# Allegro board CY8CKIT-059_Layout.brd
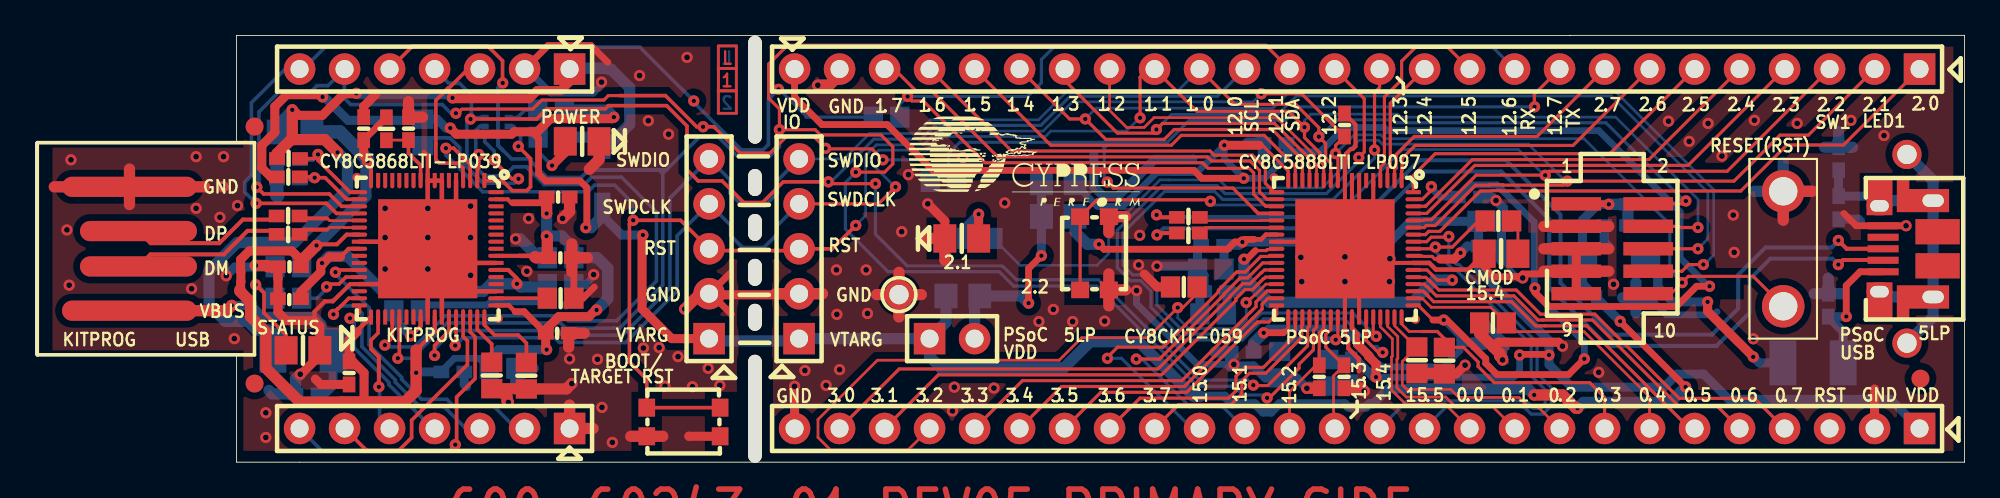
[diagram p0: board, top side]
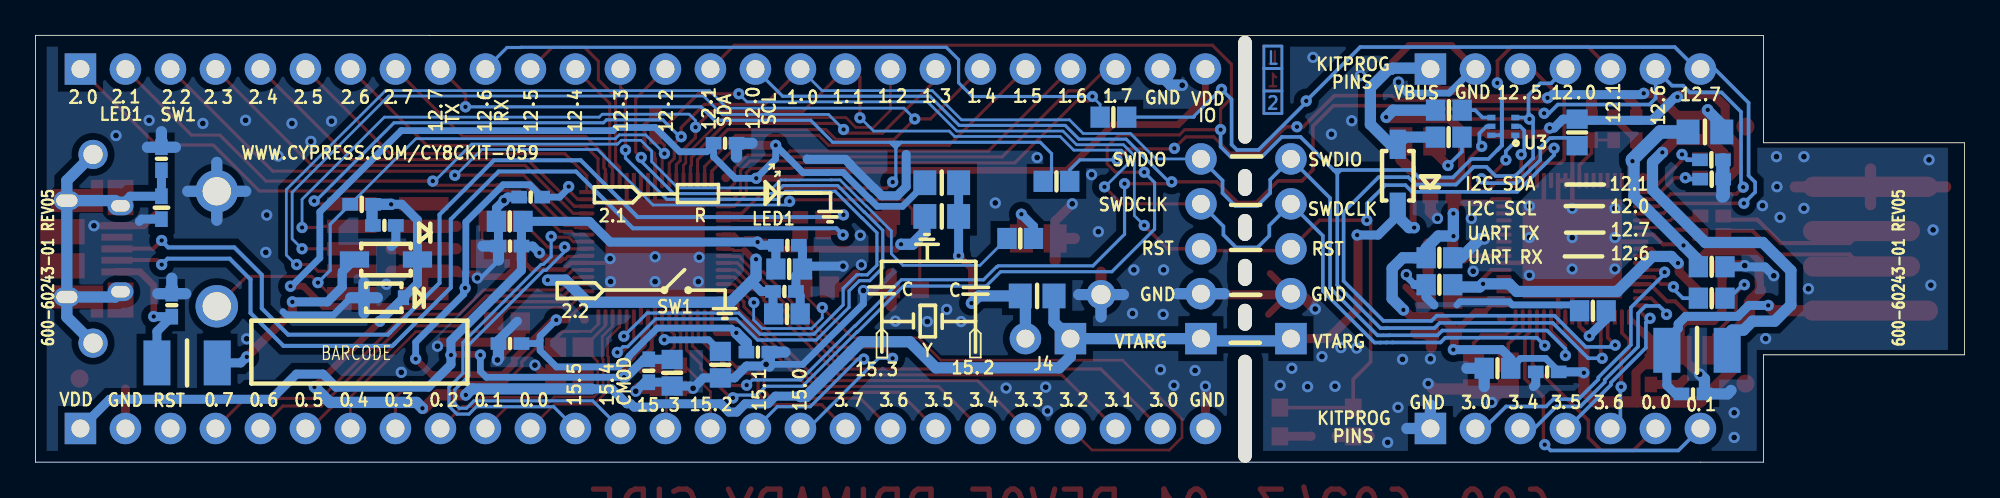
[diagram p1: board, bottom side, seen from below]

Outline 108.89 x 24.13 mm; copper layers: TOP, BOTTOM. Coordinates in mm from the lower left corner of the outline.
Outline path: 0,18.06 0,6.07 11.35,6.07 11.35,0 108.89,0 108.89,24.13 86.63,24.13 86.63,24.12 11.35,24.12 11.35,18.06 0,18.06

## Design rules (mm)
net group DP1: nets DM DP
net group DP2: nets KP_DM_P KP_DP_P
net group DP3: nets DM_P DP_P
nets with their own width: min track width 0.229; nets KP_DM KP_DP
nets with their own width: min track width 0.635; nets GND_EARTH1 GND_SIGNAL KP_VCCD KP_VDD P_VCCD VBUS VDD VTARG

## Placement (name value [footprint] x y rotation side)
C1  0.1 uF  [C-CC0402]  18.53 18.86 90 top
C2  0.1 uF  [C-CC0402]  21.06 18.86 90 top
C3  0.1 uF  [C-CC0402]  29.5 14.99 0 top
C4  2200 pF  [C-CC0805]  82.73 11.79 180 top
C5  0.1 uF  [C-CC0402]  29.63 11.56 0 top
C6  0.1 uF  [C-CC0402]  14.34 11.05 180 top
C7  1.0 uF  [C-CC0603]  64.82 9.91 180 top
C8  1.0 uF  [C-CC0603]  29.64 9.27 180 top
C9  1.0 uF  [C-CC0603]  82.27 7.87 180 top
C10  0.1 uF  [C-CC0402]  14.34 9.25 180 top
C11  0.1 uF  [C-CC0402]  29.45 7.29 0 top
C12  1.0 uF  [C-CC0603]  77.98 5.77 270 top
C13  1.0 uF  [C-CC0603]  79.53 5.74 270 top
C14  0.1 uF  [C-CC0402]  17.7 5.04 270 top
C15  1.0 uF  [C-CC0603]  25.76 4.9 270 top
C16  1.0 uF  [C-CC0603]  27.71 4.89 270 top
C17  0.1 uF  [C-CC0402]  73.89 19.06 90 top
C18  0.1 uF  [C-CC0402]  69.96 18.03 180 bottom
C19  0.01 uF  [C-CC0402]  101.78 17.16 90 bottom
C20  0.1 uF  [C-CC0402]  80.94 14.99 0 bottom
C21  1.0 uF  [C-CC0603]  82.12 13.61 0 bottom
C22  0.1 uF  [C-CC0402]  66.45 12.27 180 bottom
C23  0.1 uF  [C-CC0402]  82.11 12.22 0 bottom
C24  1.0 uF  [C-CC0603]  29.64 11.56 180 bottom
C25  1.0 uF  [C-CC0603]  14.27 11.05 180 bottom
C26  1.0 uF  [C-CC0603]  66.34 10.92 180 bottom
C27  0.1 uF  [C-CC0402]  101.19 8.88 90 bottom
C28  1.0 uF  [C-CC0603]  29.64 10.03 180 bottom
C29  0.1 uF  [C-CC0402]  66.61 9.65 180 bottom
C30  1.0 uF  [C-CC0603]  20.98 8.56 0 bottom
C31  1.0 uF  [C-CC0603]  66.47 8.38 180 bottom
C32  0.1 uF  [C-CC0402]  82.11 6.71 0 bottom
C33  0.1 uF  [C-CC0402]  89.19 13.39 180 bottom
C34  0.1 uF  [C-CC0402]  74.27 5.17 270 bottom
C35  0.1 uF  [C-CC0402]  68.11 6.22 180 bottom
C36  1.0 uF  [C-CC0603]  72.95 5.05 270 bottom
C37  1.0 uF  [C-CC0603]  70.23 5.51 270 bottom
C38  1.0 uF  [C-CC0603]  26.37 5.31 0 bottom
C39  0.1 uF  [C-CC0402]  23.56 5.11 0 bottom
C40  0.1 uF  [C-CC0402]  15.33 3.86 180 bottom
C41  0.1 uF  [C-CC0402]  73.86 4.83 270 top
C42  0.1 uF  [C-CC0402]  72.47 4.83 270 top
D1  MBR0520L  [SOD-123]  31.99 16.19 90 bottom
D2  MBR0520L  [SOD-123]  89.1 11.46 0 bottom
F1  PTC Resettable Fuse  [R-CR1210]  100.33 5.61 0 bottom
F2  PTC Resettable Fuse  [R-CR1210]  15.1 6.32 0 bottom
J1  HDR 1x26  [RECP26X1-VERT]  106.35 22.23 270 top
J2  HDR 1x26  [RECP26X1-VERT]  106.35 1.91 270 top
J3  HDR 1x5  [HDR5X1]  43.1 6.99 0 top
J4  HEADER 1X 2  [HDR2]  50.47 6.99 270 top
J5  50MIL KEYED SMD  [FCI-20021521]  89 12.06 270 top
J6  USB Micro-B  [USB-MICRO-B-SMT]  107.12 12.06 90 top
J7  HDR 1x5  [HDR5X1]  38.02 6.99 0 top
J8  HDR 1x7  [HDR7X1]  30.15 1.91 90 top
J9  HDR 1x7  [HDR7X1]  30.15 22.23 90 top
J10  USB FINGER  [USB-FINGER]  5.51 8.56 0 top
LED1  User LED BLUE  [CR-LED0805]  52.29 12.65 0 top
LED2  POWER LED Amber  [CR-LED0805_1]  30.86 18.14 180 top
LED3  Status LED Green  [CR-LED0805]  15.1 6.32 180 top
NOREF  -  [unnamed]  12.37 18.97 0 top
NOREF#2  -  [#2]  40.69 -8.76 0 top
NOREF#3  -  [#2]  216.88 -140.11 0 top
NOREF#4  -  [unnamed#2]  40.61 8.19 0 top
NOREF#5  -  [unnamed#3]  77.9 8.08 90 top
NOREF#6  -  [unnamed#4]  40.61 3.02 0 top
NOREF#7  -  [unnamed]  12.37 4.45 0 top
NOREF#8  -  [unnamed#2]  40.61 13.27 0 top
NOREF#9  -  [unnamed#3]  69.92 16.08 90 top
NOREF#10  -  [#2]  8.05 25.53 0 top
NOREF#11  -  [#2]  -1.63 6.07 90 top
NOREF#12  -  [#2]  113.93 -47.94 0 top
NOREF#13  -  [unnamed#3]  26.13 8.12 90 top
NOREF#14  -  [#2]  -214.2 -216.79 0 top
NOREF#15  -  [#2]  108.89 0 90 top
NOREF#16  -  [unnamed#4]  40.61 21.06 0 top
NOREF#17  -  [#2]  11.23 24.26 0 top
NOREF#18  -  [unnamed#2]  40.61 10.73 0 top
NOREF#19  -  [unnamed]  106.4 4.72 0 top
NOREF#20  -  [#2]  0 18.06 0 top
NOREF#21  -  [#2]  40.82 24.51 0 top
NOREF#22  -  [unnamed#2]  40.61 15.81 0 top
NOREF#23  -  [#2]  0 6.69 0 top
NOREF#24  -  [#2]  215.1 -114.71 0 top
NOREF#25  -  [unnamed#3]  18.14 16.1 90 top
NOREF#26  -  [#2]  38.6 12.06 180 bottom
NOREF#27  -  [#2]  -87.45 -141.35 180 bottom
NOREF#28  -  [#2]  58.66 12.06 180 bottom
R1  4.7K  [R-CR0402]  19.81 18.85 270 top
R2  15K  [R-CR0402]  14.29 17.17 0 top
R3  15K  [R-CR0402]  14.27 16.13 0 top
R4  22E  [R-CR0402]  14.26 13.92 0 top
R5  ZERO  [R-CR0603]  82.58 13.64 180 top
R6  22E  [R-CR0402]  14.26 12.88 0 top
R7  2.2K  [R-CR0603]  29.11 19.9 180 bottom
R8  ZERO  [R-CR0805]  14.66 18.67 180 bottom
R9  2.2K  [R-CR0603]  21.87 18.64 270 bottom
R10  560 ohm  [R-CR0603]  29.12 18.38 0 bottom
R11  ZERO  [R-CR0805]  57.73 13.89 0 bottom
R12  100K  [R-CR0402]  101.78 14.39 270 bottom
R13  30K  [R-CR0402]  14.29 17.09 180 bottom
R14  30K  [R-CR0402]  14.27 16 180 bottom
R15  ZERO  [R-CR0805]  57.73 15.8 0 bottom
R16  22E  [R-CR0402]  65.07 13.84 0 top
R17  22E  [R-CR0402]  65.07 12.95 0 top
R18  820 ohm  [R-CR0603]  53.3 12.65 180 bottom
R19  4.7K  [R-CR0402]  90.47 14.58 0 bottom
R20  ZERO  [R-CR0805]  52.35 9.4 0 bottom
R21  820 ohm  [R-CR0603]  14.27 9.27 180 bottom
R22  ZERO  [R-CR0603]  51.26 15.88 180 bottom
R23  ZERO  [R-CR0603]  48.04 19.51 180 bottom
SW1  Switch  [SWITCH-4PIN]  59.78 11.81 0 top
SW2  SW PUSHBUTTON  [THSWITCH]  98.65 12.06 90 top
SW3  Switch  [SWITCH-4PIN]  36.58 2.27 270 top
TP1  BLACK  [TP-43R_S]  48.74 9.47 0 top
TP2  BLACK  [TP-43R_S]  105.64 6.73 0 top
TP3  BLACK  [TP-43R_S]  105.64 17.4 0 top
TVS1  TVS DIODE  [SOD323]  89.23 9.3 0 bottom
U1  CY8C5868LTI-LP039 QFN68  [QFN68_8X8MM]  22.14 12.06 270 top
U2  CY8C5888LTI-LP097 QFN68  [QFN68_8X8MM]  73.91 12.06 270 top
U3  NTZD3152P  [SOT563]  26.04 18.99 0 bottom

## Library data of the parts
C1-C3 C5 C6 C10 C11 C14 C17 C18 C20 C22 C23 C27 C29 C32-C35 C39-C42 = 0.1 uFd 0402: alternate symbols: (C-CC0402_A)
C4 = CAP
C7-C9 C12 C13 C15 C16 C21 C24-C26 C28 C30 C31 C36-C38 = 1_0.0 uFd 0603 X5R 25V 10%: alternate symbols: (C-CC0603_A)
C19 = 0_0.01 uFd 0402 X7R
D1 D2 = TMP_134158
F1 F2 = FUSE_4
J1 J2 = CONN FLEX 27_0
J3 J7 = HDR 1x5 Keyed 0.1_M
J4 = CONN FLEX 2
J5 = 10 Pin Header 50mil Keyed SMD
J6 = USB Micro-B_2
J8 J9 = 8x1 RECPT VERT_0
J10 = USB MINI AB Right Angle_0
LED1-LED3 = LED Green 0805
R1 R19 = 4_0.7K ohm 5% 0603: alternate symbols: (R-CR0603_A)
R2 R3 R10 R13 R14 = RESISTOR
R4 R6 R16 R17 = 24 ohm 5% 0603 _0
R5 R22 R23 = Zero ohm 0603_2: alternate symbols: (R-CR0603_A)
R7 R9 = 2_0.2K ohm 5% 0603: alternate symbols: (R-CR0603_A)
R8 R11 R15 R20 = 330 ohm 5% 0805_1
R12 = 100K ohm 5% 0402: alternate symbols: (R-CR0402_A)
R18 R21 = 330 ohm 5% 0805_0
SW1 SW3 = Switch Pushbutton
SW2 = Push_Through_Hole
TP1-TP3 = TEST_POINT
TVS1 = TVS 5V SOD-323_0
U1 = CY8C5868LTI-LP039 QFN68
U2 = CY8C5888LTI-LP097 QFN68
U3 = FET DUAL P-CH 20V 430mA SOT-563

## Footprints (pads in the part's own frame, mm; a bottom-side part is the same pattern mirrored in y, then rotated)
C-CC0402
  rect 0.889x0.711 smd: 1(-0.648,0) 2(0.648,0)
C-CC0603
  rect 1.092x1.194 smd: 1(-0.749,0) 2(0.749,0)
C-CC0805
  rect 1.295x1.6 smd: 1(-0.953,0) 2(0.953,0)
CR-LED0805
  rect 1.295x1.6 smd: 1(-0.953,0) 2(0.953,0)
CR-LED0805_1
  rect 1.295x1.6 smd: 1(-0.953,0) 2(0.953,0)
FCI-20021521
  rect 0.759x2.799 smd: 1(-2.54,-2.029) 2(-2.54,2.029) 3(-1.27,-2.029) 4(-1.27,2.029) 5(0,-2.029) 6(0,2.029) 7(1.27,-2.029) 8(1.27,2.029) 9(2.54,-2.029) 10(2.54,2.029)
HDR2
  rect 1.778x1.778 hole 1.016: 1(0,0)
  round 1.778 hole 1.016: 2(0,2.54)
HDR5X1
  rect 1.778x1.778 hole 1.016: 1(0,0)
  round 1.778 hole 1.016: 2(0,2.54) 3(0,5.08) 4(0,7.62) 5(0,10.16)
HDR7X1
  rect 1.778x1.778 hole 1.016: 1(0,0)
  round 1.778 hole 1.016: 2(0,2.54) 3(0,5.08) 4(0,7.62) 5(0,10.16) 6(0,12.7) 7(0,15.24)
QFN68_8X8MM
  custom 0.864x0.23 smd: 1(-3.851,3.2) 2(-3.851,2.799) 3(-3.851,2.4) 4(-3.851,1.999) 5(-3.851,1.6) 6(-3.851,1.199) 7(-3.851,0.8) 8(-3.851,0.399) 9(-3.851,0) 10(-3.851,-0.399) 11(-3.851,-0.8) 12(-3.851,-1.199) 13(-3.851,-1.6) 14(-3.851,-1.999) 15(-3.851,-2.4) 16(-3.851,-2.799) 17(-3.851,-3.2) 35(3.851,-3.2) 36(3.851,-2.799) 37(3.851,-2.4) 38(3.851,-1.999) 39(3.851,-1.6) 40(3.851,-1.199) 41(3.851,-0.8) 42(3.851,-0.399) 43(3.851,0) 44(3.851,0.399) 45(3.851,0.8) 46(3.851,1.199) 47(3.851,1.6) 48(3.851,1.999) 49(3.851,2.4) 50(3.851,2.799) 51(3.851,3.2)
  custom 0.23x0.864 smd: 18(-3.2,-3.851) 19(-2.799,-3.851) 20(-2.4,-3.851) 21(-1.999,-3.851) 22(-1.6,-3.851) 23(-1.199,-3.851) 24(-0.8,-3.851) 25(-0.399,-3.851) 26(0,-3.851) 27(0.399,-3.851) 28(0.8,-3.851) 29(1.199,-3.851) 30(1.6,-3.851) 31(1.999,-3.851) 32(2.4,-3.851) 33(2.799,-3.851) 34(3.2,-3.851) 52(3.2,3.851) 53(2.799,3.851) 54(2.4,3.851) 55(1.999,3.851) 56(1.6,3.851) 57(1.199,3.851) 58(0.8,3.851) 59(0.399,3.851) 60(0,3.851) 61(-0.399,3.851) 62(-0.8,3.851) 63(-1.199,3.851) 64(-1.6,3.851) 65(-1.999,3.851) 66(-2.4,3.851) 67(-2.799,3.851) 68(-3.2,3.851)
  rect 5.601x5.601 smd: 69(0,0)
R-CR0402
  rect 0.889x0.711 smd: 1(-0.648,0) 2(0.648,0)
R-CR0603
  rect 1.092x1.194 smd: 1(-0.749,0) 2(0.749,0)
R-CR0805
  rect 1.295x1.397 smd: 1(-0.953,0) 2(0.953,0)
R-CR1210
  rect 1.524x2.54 smd: 1(-1.702,0) 2(1.702,0)
RECP26X1-VERT
  rect 1.778x1.778 hole 1.016: 1(0,0)
  round 1.778 hole 1.016: 2(0,-2.54) 3(0,-5.08) 4(0,-7.62) 5(0,-10.16) 6(0,-12.7) 7(0,-15.24) 8(0,-17.78) 9(0,-20.32) 10(0,-22.86) 11(0,-25.4) 12(0,-27.94) 13(0,-30.48) 14(0,-33.02) 15(0,-35.56) 16(0,-38.1) 17(0,-40.64) 18(0,-43.18) 19(0,-45.72) 20(0,-48.26) 21(0,-50.8) 22(0,-53.34) 23(0,-55.88) 24(0,-58.42) 25(0,-60.96) 26(0,-63.5)
SOD323
  rect 0.635x0.838 smd: 1(-1.113,0) 2(1.113,0)
SOD-123
  rect 1.651x0.914 smd: 1(-1.778,0) 2(1.778,0)
SOT563
  rect 0.457x0.305 smd: 1(-0.676,0.5) 2(-0.676,0) 3(-0.676,-0.5) 4(0.676,-0.5) 5(0.676,0) 6(0.676,0.5)
SWITCH-4PIN
  rect 1.016x0.94 smd: 1A(-0.81,2.07) 1B(-0.81,-2.07) 2A(0.81,2.07) 2B(0.81,-2.07)
THSWITCH
  round 2.4 hole 1.6: 1(-3.251,0) 2(3.251,0)
TP-43R_S
  round 1.651 hole 1.092: 1(0,0)
unnamed
  round 1.016 smd: (0,0)
unnamed#2
  oval 0.762x1.524 hole 0.762x1.524 unplated: (0,0)
unnamed#3
  round 0.508 smd: (0,0)
unnamed#4
  oval 0.762x6.096 hole 0.762x6.096 unplated: (0,0)
USB-FINGER
  oval 7.62x1.143 smd: 1(-0.203,0) 4(-0.203,7.003)
  oval 6.604x1.143 smd: 2(0.305,2.502) 3(0.305,4.501)
USB-MICRO-B-SMT
  rect 0.399x1.75 smd: 1(-1.3,2.824) 2(-0.65,2.824) 3(0,2.824) 4(0.65,2.824) 5(1.3,2.824)
  oval 1.059x1.46 hole 0.65x1.049: 6(-2.426,3.03) 7(2.426,3.03)
  oval 1.064x1.476 hole 0.701x1.199: 8(-2.725,0) 9(2.725,0)

## Nets
GND_EARTH1: C19.1 J6.6(S1) J6.7(S2) J6.8(S3) J6.9(S4) R12.1 TP2.1 TP3.1
GND_SIGNAL: C1.2 C2.2 C3.2 C4.2 C5.2 C6.2 C7.2 C8.1 C9.2 C10.2 C11.2 C12.2 C13.2 C14.2 C15.2 C16.2 C17.2 C18.2 C19.2 C20.2 C21.2 C22.2 C23.2 C24.2 C25.2 C26.2 C27.2 C28.1 C29.2 C30.2 C31.2 C32.2 C33.2 C34.2 C35.2 C36.2 C37.2 C38.2 C39.2 C40.2 C41.2 C42.2 J1.25 J2.2 J2.26 J3.2 J5.3 J5.5 J5.7 J5.9 J6.5(GND) J7.2 J8.1 J9.2 J10.4(GND) LED1.1(K) LED2.1(K) LED3.1(K) R12.2 R13.2 R14.2 SW1.2A SW1.2B SW2.2 SW3.2A SW3.2B TP1.1 TVS1.2(A) U1.5(VSSB) U1.7(VBOOST) U1.8(VBAT) U1.9(VSSD#9) U1.25(VSSD#25) U1.31(P3_2) U1.43(VSSA) U1.45(VSSD#45) U1.54(P0_5) U1.58(VSSD#58) U1.69(EPAD) U2.5(VSSB) U2.7(VBOOST) U2.8(VBAT) U2.9(VSSD#9) U2.25(VSSD#25) U2.43(VSSA) U2.45(VSSD#45) U2.58(VSSD#58) U2.69(EPAD)
VBUS: D1.2(ANODE) F2.1 J9.1 R2.1 R8.2 R10.2
VCCA: C30.1 U1.42(VCCA)
VCCA_12826895: C37.1 U2.42(VCCA)
VDD: C21.1 C22.1 C23.1 C26.1 C34.1 C36.1 J2.1 R11.2 U2.24(VDDD#24) U2.44(VDDA) U2.59(VDDD#59)
VDDIO: C18.1 C20.1 C32.1 C35.1 J1.26 R15.2 U2.17(VDDIO1) U2.35(VDDIO3) U2.52(VDDIO0) U2.67(VDDIO2)
DM: J6.2(DM) R17.1
DM_P: R17.2 U2.23(P15_7 DM)
DP: J6.3(DP) R16.1
DP_P: R16.2 U2.22(P15_6 DP)
I2C_SCL: J1.16 J9.4 U1.38(SIO, I2C1_SCL P12_0) U2.38(SIO, I2C1_SCL P12_0) U3.3(D2)
I2C_SDA: J1.15 J9.5 U1.39(SIO, I2C1_SDA P12_1) U2.39(SIO, I2C1_SDA P12_1) U3.6(D1)
KP_DM: J10.2(DM) R6.1
KP_DM_P: R6.2 U1.23(P15_7 DM)
KP_DP: J10.3(DP) R4.1
KP_DP_P: R4.2 U1.22(P15_6 DP)
KP_P0_0: J8.6 U1.48(P0_0)
KP_P0_1: J8.7 U1.49(P0_1)
KP_P0_2: C15.1 U1.50(P0_2)
KP_P0_3: C16.1 U1.51(P0_3)
KP_P0_4: C8.2 U1.53(P0_4)
KP_P0_6: U1.55(P0_6)
KP_P0_7: U1.56(P0_7)
KP_P1_6: R2.2 R13.1 U1.18(P1_6)
KP_P1_7: R3.2 R14.1 U1.19(P1_7)
KP_P2_6: U1.1(P2_6) U3.5(G2)
KP_P2_7: U1.2(P2_7) U3.2(G1)
KP_P3_0: J8.2 U1.29(P3_0)
KP_P3_1: R21.1 U1.30(P3_1)
KP_P3_4: J8.3 U1.33(P3_4)
KP_P3_5: J8.4 U1.34(P3_5)
KP_P3_6: J8.5 U1.36(P3_6)
KP_P12_5: J9.3 U1.4(P12_5 I2C0_SDA, SIO)
KP_VCCD: C10.1 C28.2 U1.26(VCCD#26) U1.57(VCCD#57)
KP_VDD: C1.1 C3.1 C5.1 C6.1 C11.1 C14.1 C24.1 C25.1 C38.1 C39.1 R1.1 R8.1 U1.17(VDDIO1) U1.24(VDDD#24) U1.35(VDDIO3) U1.44(VDDA) U1.52(VDDIO0) U1.59(VDDD#59) U1.67(VDDIO2)
KP_XRES: C2.1 R1.2 U1.10(XRES)
P0_0: J2.11 U2.48(P0_0)
P0_1: J2.10 U2.49(P0_1)
P0_2: C12.1 J2.9 U2.50(P0_2)
P0_3: C13.1 J2.8 U2.51(P0_3)
P0_4: C9.1 J2.7 U2.53(P0_4)
P0_5: J2.6 U2.54(P0_5)
P0_6: J2.5 U2.55(P0_6)
P0_7: J2.4 U2.56(P0_7)
P1_2: J1.19 U2.13(P1_2)
P1_3: J1.20 J5.6 U2.14(P1_3)
P1_4: J1.21 J5.8 U2.15(P1_4)
P1_5: J1.22 U2.16(P1_5)
P1_6: J1.23 U2.18(P1_6)
P1_7: J1.24 U2.19(P1_7)
P2_0: J1.1 U2.62(P2_0)
P2_1: J1.2 R18.1 U2.63(P2_1)
P2_2: J1.3 SW1.1A SW1.1B U2.64(P2_2)
P2_3: J1.4 U2.65(P2_3)
P2_4: J1.5 U2.66(P2_4)
P2_5: J1.6 U2.68(P2_5)
P2_6: J1.7 U2.1(P2_6)
P2_7: J1.8 U2.2(P2_7)
P3_0: J2.25 U2.29(P3_0)
P3_1: J2.24 U2.30(P3_1)
P3_2: C7.1 J2.23 U2.31(P3_2)
P3_3: J2.22 U2.32(P3_3)
P3_4: J2.21 U2.33(P3_4)
P3_5: J2.20 U2.34(P3_5)
P3_6: J2.19 U2.36(P3_6)
P3_7: J2.18 U2.37(P3_7)
P5LP_VDD: J4.2 R11.1 R15.1 R20.2
P12_2: J1.14 U2.46(SIO_P12_2)
P12_3: J1.13 U2.47(SIO_P12_3)
P12_4: J1.12 U2.3(P12_4 I2C0_SCL, SIO)
P12_5: J1.11 U2.4(P12_5 I2C0_SDA, SIO)
P12_6: J1.10 R23.1 U2.20(P12_6_SIO)
P12_7: J1.9 R22.1 U2.21(P12_7_SIO)
P15_0: J2.17 U2.27(P15_0)
P15_1: J2.16 U2.28(P15_1)
P15_2: C42.1 J2.15 U2.40(P15_2)
P15_3: C41.1 J2.14 U2.41(P15_3)
P15_4: J2.13 R5.2 U2.60(P15_4)
P15_5: J2.12 U2.61(P15_5)
P_VCCD: C29.1 C31.1 U2.26(VCCD#26) U2.57(VCCD#57)
P_XRES: J2.3
PROG_RESET: C17.1 J3.3 J5.10 J7.3 R19.2 SW2.1 SW3.1A SW3.1B U1.3(P12_4 I2C0_SCL, SIO) U2.10(XRES)
PROG_SWDCLK: J1.18 J3.4 J5.4 J7.4 U1.47(SIO_P12_3) U2.12(P1_1)
PROG_SWDIO: J1.17 J3.5 J5.2 J7.5 U1.46(SIO_P12_2) U2.11(P1_0)
UART RX: J9.6 R22.2 U1.20(P12_6_SIO)
UART TX: J9.7 R23.2 U1.21(P12_7_SIO)
VTARG: C33.1 D1.1(CATHODE) D2.1(CATHODE) J3.1 J4.1 J5.1 J7.1 R3.1 R7.1 R9.1 R19.1 R20.1 TVS1.1(K)
N11032: C40.1 F2.2 J10.1(VBUS)
N11130: LED2.2(A) R10.1
N039981: R9.2 U3.1(S1)
N046484: R7.2 U3.4(S2)
N5090994: LED1.2(A) R18.2
N5091026: C27.1 F1.2 J6.1(VBUS)
N12931548: D2.2(ANODE) F1.1
N12939185: C4.1 R5.1
N16779589: LED3.2(A) R21.2

Pads without a net: J6 4; U1 6 11 12 13 14 15 16 27 28 32 37 40 41 60 61 62 63 64 65 66 68; U2 6

## Via types
v1: diameter 0.635, hole 0.254, TOP to BOTTOM, 118 vias
v2: diameter 0.635, hole 0.33, TOP to BOTTOM, 102 vias

## Routing (per net, layer and track width the routed paths; a pad name or vN(x,y) marks a point on that pad's centre or on a via; arc(x,y) is an arc through that point)
GND_EARTH1: length 22.2
  BOTTOM w0.508: C19.1 R12.1 103.54,15.04 J6.7
  BOTTOM w0.635: J6.8 107.12,8.21 TP2.1 ; J6.8 104.39,9.34 J6.6 ; J6.8 J6.9 ; TP3.1 107.12,15.92 J6.9 ; J6.9 104.39,14.79 J6.7
GND_SIGNAL: length 314.8
  TOP w0.229: U2.45 74.71,11.26 ; 74.71,11.26 U2.69 ; 74.71,11.26 U2.58 ; 74.31,12.46 U2.8 ; 74.31,12.46 74.71,12.87 ; 74.31,12.46 U2.69 ; 74.1,6.44 74.1,7.04 73.91,7.23 U2.43 v2(73.91,10.21) ; 21.92,17.55 22.07,17.4 22.07,17.37 22.14,17.3 U1.9 ; U2.69 73.52,12.46 U2.25 ; U2.69 U2.9 73.91,17.15 73.97,17.2 73.97,17.43 74.24,17.7 74.36,17.7 74.51,17.86 74.51,19.09 C17.2 ; 15.75,8 15.75,8.51 16.33,9.09 16.79,9.09 17.76,10.07 U1.31 ; 74.71,12.87 U2.7 ; 74.71,12.87 75.51,13.67 U2.5
  TOP w0.254: U2.58 78.68,11.26 79.05,10.89 80.88,10.89 C4.2 ; U1.31 20.14,10.07 U1.69 ; U1.58 22.94,11.26 ; 22.94,11.26 24.54,9.66 U1.54 ; 22.94,11.26 U1.69 ; 22.94,11.26 U1.45 ; 22.94,12.87 23.74,13.67 U1.5 ; 22.94,12.87 U1.7 U1.8 U1.9 U1.69 ; 22.94,12.87 U1.69 ; U1.69 U1.43 ; U1.69 21.74,12.46 U1.25 ; 74.1,6.44 74.1,6.43 74.7,5.83 74.7,5.14
  TOP w0.381: 85.13,10.79 84.98,10.64 83.95,10.64 83.72,10.41 83.64,10.49 82.31,10.49 81.78,11.03 C4.2 ; 39.19,10.67 38.05,9.53 ; 102.07,14.06 102.77,13.37 J6.5 v2(105.59,13.37) 105.59,13.37 ; 32.31,22.61 31.36,23.56 28.94,23.56 J9.2 ; 30.28,10.77 30.39,10.65 C8.1 30.91,9.27 31.55,9.91 ; 38.19,9.46 39.29,8.36
  TOP w0.508: v2(42.85,4.29) J2.26 ; C14.2 16.1,4.39 15.8,4.7 ; J5.9 J5.7 J5.5 ; v2(80.7,5.49) 80.2,4.99 C13.2 ; C6.2 13.69,11.05 13.69,10.39 13.69,10.39 C10.2 13.69,8.48 14.17,8 15.75,8 16.05,7.7 LED3.1 16.05,6.03 14.99,4.97 v2(14.95,4.97) ; 19.21,20.79 18.53,20.12 C1.2 ; J7.2 38.13,9.53 38.19,9.46 43.04,9.46 J3.2 ; SW3.2A 36.89,1.46 36.88,1.47 ; J2.2 103.81,4.14 ; v2(71.42,11.58) 72.72,11.58 73.57,12.43 73.91,12.43 ; 82.29,6.5 82.57,6.78 85.97,6.78 v2(86.2,6.56) ; v2(50.37,14.61) 51.33,13.64 LED1.1 ; C7.2 63.32,9.91 62.59,10.64 ; v2(73.91,11.61) U2.69
  TOP w0.635: 21.85,19.51 C2.2 21.06,20.39 ; C5.2 31.16,11.56 ; C5.2 30.28,10.77 ; C5.2 30.28,12.35 ; SW1.2B 60.59,10.65 ; SW1.2B 61.53,9.74 ; SW1.2B 60.59,8.84 ; 60.59,12.98 SW1.2A 61.53,13.88 ; J7.2 37.52,9.53 v2(36.65,8.66) ; C41.2 74.84,4.18 v2(75.01,4.01) ; v2(12.41,11.12) 13.07,11.12 13.13,11.05 C6.2 ; J10.4 5.31,16.57 ; J10.4 1.06,15.57 ; J10.4 9.55,15.57 ; J10.4 5.31,14.56 ; 88.81,13.34 85.14,13.34 ; J1.25 45.39,21.9 44.8,21.31 v2(44.16,21.31) ; 100.29,15.32 SW2.2 98.65,13.68 ; 31.47,1.91 J8.1 30.15,3.23 ; 51.33,11.41 LED1.1 50.25,12.65 ; 85.14,10.79 J5.7 88.81,10.79 ; C15.2 26.15,4.15 ; 26.15,4.15 27.7,4.15 C16.2 29.97,4.14 v2(30.28,4.45) ; 26.15,4.15 26.62,3.68 26.62,3.45 v2(26.7,3.38) ; C42.2 v2(71.77,4.18) ; 88.81,12.06 J5.5 85.14,12.06 ; 48.74,8.21 TP1.1 ; TP1.1 50,9.47 ; TP1.1 48.74,10.73 ; TP1.1 47.48,9.47 ; 33.6,1.46 SW3.2B 35.41,1.46 ; C3.2 30.15,14.18 v2(29.75,13.78) ; LED2.1 31.81,17.11 31.27,16.56 ; 30.1,6.5 C11.2 30.98,7.29 ; C12.2 79.5,5.02 C13.2 ; v2(82.81,5.78) 82.81,5.83 82.65,5.99 82.65,6.14 81.52,7.27 C9.2 ; 41.78,9.53 J3.2 44.43,9.53
  BOTTOM w0.254: 82.75,11.43 82.75,11.4 83.74,10.42 83.94,10.42 v2(83.95,10.41)
  BOTTOM w0.381: J9.2 27.74,22.23 29.1,20.87 31.48,20.87 31.95,21.34 v2(31.95,21.49) ; 31.04,10.03 31.51,10.5 v2(31.51,10.6) ; v2(62.15,9.7) 62.15,8.95 65.58,5.53 v2(67.65,5.53) ; 28.66,8.89 28.48,9.07 25.7,9.07 25.52,8.89 22.1,8.89 21.75,8.54 C30.2 ; 91.1,9.3 91.1,9.29 92.06,8.33 94.74,8.33 94.92,8.51
  BOTTOM w0.508: v2(10.77,10.54) 11.26,11.04 12.33,11.04 v2(12.41,11.12) 12.47,11.05 C25.2 ; R12.2 102.9,13.74 103.02,13.61 ; C32.2 82.75,6.91 81.69,7.98 ; v2(67.65,5.53) 67.74,5.44 68.76,5.44 69.43,4.76 C37.2 71.18,4.76 v2(71.77,4.18) 71.89,4.31 C36.2 73.16,4.52 C34.2 74.5,4.52 v2(75.01,4.01) ; C33.2 88.54,12.45 88.8,12.19 ; 31.04,10.03 C28.1 30.39,9.33 29.95,8.89 ; C26.2 65.96,10.55 C29.2 65.72,9.41 C31.2 ; C26.2 65.44,11.08 v2(63.3,11.08) ; C26.2 65.6,12.06 C22.2 ; 24.33,4.27 24.21,4.39 C39.2 ; 59.74,17.4 59.74,15.57 60.25,15.06 61.13,15.06 61.55,15.49 61.56,15.49 62.92,16.84 62.92,16.87 63.17,17.12 65.3,17.12 65.33,17.14 ; C23.2 82.75,13.5 C21.2 82.87,14.37 v2(82.44,14.79) 82.25,14.99 C20.2
  BOTTOM w0.635: 44.43,9.53 J3.2 41.78,9.53 ; C24.2 28.42,11.56 27.35,12.62 v2(27.1,12.62) ; C27.2 101.98,9.53 ; C27.2 101.19,10.4 ; C27.2 100.4,9.53 ; v2(44.16,21.31) 44.8,21.31 45.39,21.9 J1.25 ; 27.11,4.28 C38.2 28.09,5.31 ; 69.32,17.24 C18.2 68.44,18.03 ; 47.48,9.47 TP1.1 ; TP1.1 50,9.47 ; TP1.1 48.74,8.21 ; C19.2 101.78,18.68 ; C19.2 100.99,17.81 ; C19.2 102.57,17.81 ; v2(14.95,4.97) 14.68,4.71 C40.2 13.38,3.86 13.18,4.06 ; SW2.2 100.29,15.32 ; SW2.2 98.65,16.95 ; SW2.2 98.65,13.68 ; SW2.2 97.02,15.32 ; 90.34,8.44 TVS1.2 ; TVS1.2 90.34,10.15 ; TVS1.2 89.59,9.3 ; TVS1.2 91.09,9.3 ; 82.75,11.43 C23.2 83.63,12.22 ; 67.46,5.43 C35.2 66.58,6.22 ; v2(82.81,5.78) 82.81,5.83 82.75,5.89 C32.2 ; 30.15,3.23 J8.1 31.47,1.91
  BOTTOM w0.762: 13.66,15.05 13.63,15.09 R14.2 13.64,16.01 R13.2
  vias: v2(1.78,13.13) v2(1.91,10.01) v2(2.01,17.09) v2(8.81,9.8) v2(9.07,17.27) v2(9.07,14.35) v2(10.41,13.84) v2(10.62,17.27) v2(10.59,15.57) v2(11.23,6.99) v2(11.4,14.5) v2(13,2.79) v2(13,1.4) v2(19.74,14.35) v2(19.74,12.7) v2(19.74,10.92) v2(22.15,14.35) v2(22.15,12.7) v2(22.15,10.92) v2(24.56,14.48) v2(24.56,12.7) v2(24.56,10.57) v2(27.74,10.79) v2(27.84,13.78) v2(30.15,5.84) v2(31.72,5.82) v2(31.98,3.1) v2(32.56,1.12) v2(34.1,21.86) v2(34.32,6.45) v2(34.59,19.3) v2(35.2,6.48) v2(35.53,4.29) v2(35.74,18.54) v2(36.27,5.97) v2(36.78,22.89) v2(37.08,4.27) v2(37.97,5.31) v2(38.63,4.34) v2(43.43,5.18) v2(44.63,4.34) v2(45.21,10.87) v2(45.24,8.36) v2(45.39,5.23) v2(46.89,10.87) v2(46.96,8.41) v2(48.89,13.03) v2(49.28,16.26) v2(51.77,2.9) v2(51.87,4.24) v2(52.35,17.22) v2(54.1,4.19) v2(54.71,14.66) v2(56.64,7.95) v2(57.45,8.64) v2(58.55,7.95) v2(60.35,7.98) v2(62.33,12.83) v2(62.27,11.15) v2(71.48,10.21) v2(76.45,11.51) v2(76.43,10.21) v2(88.24,5.08) v2(89.08,10.06) v2(92.18,19.28) v2(93.34,18.14) v2(94.41,19.15) v2(95.19,17.31) v2(95.83,13.97) v2(95.89,11.86) v2(97.03,19.33) v2(96.97,6.97) v2(99.44,19.15) v2(102.47,19.32) v2(104.34,18.47)
VBUS: length 55
  TOP w0.508: v1(23.54,20.6) 23.59,20.55 27.86,20.55 28.32,21.01 29.64,21.01 30.15,21.51 J9.1 ; v1(14.5,19.92) 14.55,19.92 14.86,19.61 16.2,19.61 17.41,20.83 18.03,20.83 18.05,20.85 v1(18.11,20.85)
  TOP w0.635: 14.5,18.31 14.57,18.24 16.33,18.24 v1(17.06,17.51) ; 14.5,18.31 13.64,17.45 R2.1 ; 14.5,18.31 v1(14.5,19.92)
  BOTTOM w0.381: 31.64,18.33 D1.2
  BOTTOM w0.508: v1(23.54,20.6) 23.45,20.6 23.26,20.78 18.18,20.78 v1(18.11,20.85)
  BOTTOM w0.635: v1(14.5,19.92) 14.5,19.88 13.7,19.09 R8.2 ; v1(17.06,17.51) 17.61,16.95 17.61,15.41 14.63,12.42 11.39,12.42 9.8,10.83 9.8,8.88 10.71,7.97 11.97,7.97 12.48,7.47 13.13,7.47 13.4,7.2 F2.1 ; R10.2 31.58,18.38 31.64,18.33 31.97,17.97 D1.2 32.41,17.97 33.54,19.1 33.54,21.18 32.49,22.23 32.33,22.23 32.28,22.28 30.2,22.28 J9.1
VCCA: length 3.1
  TOP w0.229: U1.42 21.74,7.69 21.57,7.52 21.56,7.52 v1(21.18,7.14)
  BOTTOM w0.508: v1(21.18,7.14) 20.23,8.09 C30.1
VCCA_12826895: length 4.8
  TOP w0.178: U2.42 73.52,7.11 73.39,6.99 v1(73.39,6.92)
  BOTTOM w0.381: C37.1 70.89,6.92 73.32,6.92 73.33,6.92 v1(73.39,6.92)
VDD: length 84
  TOP w0.178: U2.59 78.24,11.67 78.27,11.63 78.83,11.63 78.98,11.48 79.3,11.48
  TOP w0.254: 68.78,12.6 69.19,12.6 69.45,12.87 U2.24 ; 74.63,6.68 74.63,7.24 74.31,7.55 U2.44
  TOP w0.381: v1(83.78,6.06) 83.81,6.1 85.42,6.1 85.44,6.08 v1(85.44,6.06) ; v1(60.03,12.32) 60.31,12.04 67.28,12.04 67.69,12.45 v1(68.13,12.45) 68.28,12.6 68.78,12.6
  TOP w0.508: 79.3,11.48 80.09,11.48 v1(80.44,11.84) ; 74.63,6.68 74.63,6.66 75.24,6.05 75.24,5.99 75.67,5.56 v1(75.67,4.81)
  BOTTOM w0.381: v1(83.78,6.06) 83.78,5.14 83.44,4.8 75.67,4.8 v1(75.67,4.81)
  BOTTOM w0.508: v1(75.67,4.81) 75.54,4.81 74.53,5.82 C34.1 72.96,5.82 C36.1 ; C23.1 80.82,12.22 v1(80.44,11.84) ; C23.1 81.46,13.53 C21.1 77.62,13.61 76.45,12.45 v1(68.13,12.45) 67.95,12.27 C22.1 C26.1 ; C23.1 81.47,12.21 81.47,11.47 81.46,11.44 81.46,10.91 81.47,10.84 85.44,6.87 v1(85.44,6.06) 85.44,5.52 86.71,4.24 91.92,4.24 92.66,4.98 94.16,4.98 95.58,3.56 104.7,3.56 J2.1
  BOTTOM w0.635: R11.2 58.69,13.01 59.38,12.32 v1(60.03,12.32)
VDDIO: length 139.4
  TOP w0.178: 69.08,17.92 69.26,17.92 70.71,16.46 U2.17 ; U2.67 78.29,14.86 78.79,15.37 v1(78.79,15.58) ; 70.47,7.35 70.71,7.59 U2.35 ; 78.88,8.04 78.05,8.86 U2.52
  TOP w0.381: v1(87.43,5.84) 86.54,4.95 82.5,4.95 81.86,5.59 81.86,5.85 79.67,8.04 v1(79.49,8.04) 79.49,8.04 78.88,8.04 ; v1(84.64,9.85) 84.64,9.6 85.43,8.8 92.62,8.8 93.77,9.95 v1(94.5,9.95) ; 70.47,7.35 70.44,7.32 69.34,7.32 v1(69.33,7.31) ; J1.26 42.85,20.81 42.85,20.63 42.91,20.57 42.91,20.57 44.39,19.09 48.07,19.09 50.67,16.5 65.39,16.5 65.84,16.05 v1(68.2,16.05)
  TOP w0.508: v1(67.11,17.92) 69.08,17.92
  BOTTOM w0.381: v1(79.49,8.04) 80.4,7.13 80.4,6.9 ; 80.4,6.9 80.4,6.31 79.48,5.38 75.99,5.38 75.83,5.54 75.77,5.54 75.39,5.93 75.39,5.98 73.79,7.58 69.6,7.58 v1(69.33,7.31) ; 80.4,6.9 80.59,6.71 C32.1 ; 70.61,17.93 70.99,17.55 72.52,17.55 73.9,18.92 76.12,18.92 76.29,18.75 88.24,18.75 92.84,14.15 92.84,11.54 94.43,9.95 v1(94.5,9.95) ; 70.61,17.93 70.61,17.27 69.39,16.05 v1(68.2,16.05) 67.11,17.15 v1(67.11,17.92) 65.57,16.38 64.17,16.38 64.17,16.38 63.3,16.38 61.81,14.89 61.8,14.89 61.37,14.47 59.95,14.47 58.69,15.73 R15.2 ; 70.61,17.93 C18.1 ; v1(87.43,5.84) 87.43,6.78 84.72,9.49 84.72,9.75 84.64,9.84 v1(84.64,9.85) 84.61,9.87 84.61,10.7 84.59,10.71 84.59,13.58 82.49,15.68 80.99,15.68 C20.1 79.3,14.99 78.79,15.49 v1(78.79,15.58)
  BOTTOM w0.635: C35.1 68.76,6.74 v1(69.33,7.31)
DM: length 53.4
  TOP w0.229: v1(101.77,11.17) 102.02,11.43 104.28,11.43 J6.2 ; R17.1 63.41,12.95 v1(63.3,12.85)
  BOTTOM w0.229: v1(101.77,11.17) 101.43,11.51 97.92,11.51 96.75,10.33 96.75,8.43 94.89,6.57 88.74,6.57 88.62,6.7 88.62,6.7 85.45,9.87 85.45,13.73 82.74,16.43 78.37,16.43 75.16,13.22 63.68,13.22 v1(63.3,12.85)
DM_P: length 4.5
  TOP w0.152: U2.23 69.2,13.26 69.19,13.27 66.28,13.27 66.26,13.26 66.03,13.26 R17.2
DP: length 53.5
  TOP w0.229: R16.1 63.42,13.84 v1(63.28,13.98) ; J6.3 102.23,12.06 v1(101.77,12.53)
  BOTTOM w0.229: v1(63.28,13.98) 63.4,13.86 74.9,13.86 78.11,17.07 78.64,17.07 78.64,17.07 83.01,17.07 86.08,14 86.08,10.13 88.88,7.33 88.88,7.33 89.01,7.21 94.63,7.21 96.11,8.7 96.11,10.59 97.66,12.14 101.4,12.14 101.77,12.51 v1(101.77,12.53)
DP_P: length 4.4
  TOP w0.152: U2.22 69.2,13.67 69.19,13.66 65.91,13.66 R16.2
I2C_SCL: length 130
  TOP w0.178: U2.38 71.92,7.7 71.81,7.59 71.81,6.58 69.56,4.33 68.77,4.33 v1(68.75,4.36) ; v1(44.75,15.85) 44.86,15.75 v1(47.41,15.75)
  TOP w0.203: v1(44.75,15.85) 42.21,15.85 41.04,14.68 39.98,14.68 38.76,15.9 37.41,15.9 36.78,16.53 36.78,19 35.63,20.15 32.34,20.15 32.17,19.98 28.87,19.98 28.29,19.4 24.56,19.4 v1(24.56,19.4) ; U1.38 20.14,7.04 v1(19.72,6.62)
  BOTTOM w0.178: v1(47.41,15.75) 47.41,12.89 49.2,11.1 54.54,11.1 54.61,11.04 54.65,11.04 55.37,10.31 60.01,10.31 62.62,7.7 62.65,7.7 65.7,4.65 68.43,4.65 68.72,4.36 v1(68.75,4.36) ; v1(44.75,15.85) 44.91,15.85 47.32,18.26 49.99,18.26 50.76,19.04 56.75,19.04 58.4,20.69 66.71,20.69 J1.16
  BOTTOM w0.203: J9.4 23.33,21.42 23.94,21.42 24.61,20.75 24.61,19.71 ; 24.56,19.54 24.56,19.65 24.61,19.71 ; 24.56,19.54 24.56,19.48 ; 24.56,19.54 24.61,19.59 24.61,19.71 ; v1(19.72,6.62) 19.82,6.52 21.38,6.52 23.14,8.28 29.8,8.28 30.09,7.99 32.8,7.99 35.05,10.24 35.05,14.14 33.08,16.11 31.39,16.11 30.98,15.69 28.71,15.69 27.79,16.61 27.72,16.7 26.99,16.7 26.47,16.18 25.36,16.18 24.35,17.19 24.35,19.28 24.56,19.48 ; v1(24.56,19.4) 24.56,19.42 24.56,19.42 24.56,19.48 ; 24.56,19.48 24.56,19.49 U3.3
I2C_SDA: length 139.7
  TOP w0.178: v1(69.52,3.64) 69.65,3.64 71.33,5.31 71.33,5.54 72.14,6.35 72.14,7.45 72.31,7.63 U2.39 ; v1(46.3,16.4) 47.93,16.4 48.39,16.86 48.39,17.83 47.73,18.5 44.31,18.5 44.02,18.8 42,18.8 v1(41.99,18.8) 41.99,19.97 41.38,20.58 41.38,22.5 42.45,23.57 69.44,23.57 J1.15
  TOP w0.203: U1.39 20.54,7.48 20.53,7.47 20.53,6.91 20.54,6.9 20.54,5.96 v1(20.45,5.88) ; J9.5 21.26,23.5 25.56,23.5 26.37,22.69 26.37,21.54 26.38,21.53 v1(26.38,21.44)
  BOTTOM w0.178: v1(69.52,3.64) 69.49,3.64 69.33,3.8 68.16,3.8 67.67,4.29 65.59,4.29 62.51,7.37 62.49,7.37 59.9,9.96 55.22,9.96 54.41,10.77 48.13,10.77 45.72,13.18 45.72,15.81 v1(46.3,16.4)
  BOTTOM w0.203: 26.11,18.62 26.25,18.49 U3.6 ; 35.41,16.31 35.41,10.02 32.97,7.58 32.63,7.58 32.63,7.58 29.92,7.58 29.63,7.87 23.24,7.87 21.24,5.88 v1(20.45,5.88) ; 35.41,16.31 35.61,16.52 ; 35.41,16.31 35.2,16.52 ; 26.37,17.65 26.87,17.14 27.83,17.14 28.88,16.1 30.81,16.1 31.22,16.52 35.2,16.52 ; 35.61,16.52 37.48,18.39 38.54,18.39 39.68,17.25 41.4,17.25 41.99,17.84 v1(41.99,18.8) ; 35.61,16.52 35.2,16.52
  BOTTOM w0.229: 26.37,17.65 26.11,17.9 26.11,21.16 26.38,21.42 v1(26.38,21.44)
KP_DM: length 8.7
  TOP w0.229: J10.2 6.5,11.75 10.64,11.75 11.97,13.08 13.41,13.08 R6.1
KP_DM_P: length 3.5
  TOP w0.152: 16.45,13.15 16.48,13.15 16.61,13.27 17.42,13.27 17.43,13.26 U1.23
  TOP w0.229: R6.2 15.18,13.15 16.45,13.15
KP_DP: length 8.7
  TOP w0.229: J10.3 6.5,12.38 10.38,12.38 11.71,13.72 13.41,13.72 R4.1
KP_DP_P: length 3.5
  TOP w0.152: U1.22 17.43,13.67 17.42,13.66 16.61,13.66 16.48,13.78 16.45,13.78
  TOP w0.229: 16.45,13.78 15.05,13.78 R4.2
KP_P0_0: length 12.8
  TOP w0.203: U1.48 24.14,7.1 24.38,6.86 24.38,5.52 21.23,2.37 21.23,1.39 20.51,0.66 18.69,0.66 17.45,1.91
KP_P0_1: length 17.2
  TOP w0.203: U1.49 24.54,7.36 24.82,7.09 24.82,4.72 23.77,3.68 23.77,1.07 v1(23.7,0.99)
  BOTTOM w0.203: v1(23.7,0.99) 23.37,0.66 16.15,0.66 14.91,1.91
KP_P0_2: length 2.9
  TOP w0.203: C15.1 25.76,6.68 24.94,7.5 U1.50
KP_P0_3: length 4.3
  TOP w0.203: C16.1 27.71,6.73 27.25,7.19 25.91,7.19 25.34,7.75 U1.51
KP_P0_4: length 2.9
  TOP w0.203: C8.2 26,9.27 U1.53
KP_P1_6: length 5.7
  TOP w0.203: U1.18 17.75,15.27 15.95,17.07 v1(15.95,17.4) 15.71,17.16 14.95,17.16 R2.2
  BOTTOM w0.254: v1(15.95,17.4) 15.65,17.09 R13.1
KP_P1_7: length 4.8
  TOP w0.203: U1.19 17.57,14.86 16.36,16.08 v1(15.76,16.08) 15.71,16.13 R3.2
  BOTTOM w0.254: R14.1 15.68,16 v1(15.76,16.08)
KP_P2_6: length 7.1
  TOP w0.203: v1(27.25,17.86) 27.95,17.16 27.95,15.57 27.73,15.35 26.92,15.35 26.35,15.92 U1.1
  BOTTOM w0.203: v1(27.25,17.86) 27.38,17.99 27.38,18.59 26.99,18.99 U3.5
KP_P2_7: length 3.6
  TOP w0.203: v1(25.03,17.39) 25.03,16.64 24.94,16.56 U1.2
  BOTTOM w0.203: U3.2 25.08,18.99 24.85,18.76 24.85,17.57 v1(25.03,17.39)
KP_P3_0: length 17.1
  TOP w0.203: v1(16.93,10.74) 16.94,10.74 17.07,10.87 U1.29
  BOTTOM w0.203: 27.61,1.91 27.13,1.91 25.88,3.15 23.62,3.15 23.22,3.56 21.8,3.56 20.67,4.68 20.67,4.79 18.83,6.63 18.83,8.74 16.93,10.65 v1(16.93,10.74)
KP_P3_1: length 3.8
  TOP w0.203: v1(16.43,9.92) 16.59,10.07 17.13,10.07 17.53,10.46 U1.30
  BOTTOM w0.203: R21.1 15.9,9.27 16.43,9.8 v1(16.43,9.92)
KP_P3_4: length 14.4
  TOP w0.203: v1(16.82,8.36) 16.82,8.44 17.06,8.67 17.09,8.67 17.68,9.27 U1.33
  BOTTOM w0.203: v1(16.82,8.36) 16.82,8.42 17.24,8.83 18.01,8.83 18.43,8.42 18.43,6.53 20.31,4.65 20.31,4.52 21.68,3.15 23.05,3.15 24.29,1.91 25.07,1.91
KP_P3_5: length 9.3
  TOP w0.203: v1(17.75,8.14) 17.94,8.14 18.29,8.49 U1.34
  BOTTOM w0.203: v1(17.75,8.14) 17.99,7.9 17.99,6.47 19.96,4.5 19.96,4.37 22.43,1.91 22.53,1.91
KP_P3_6: length 6.9
  TOP w0.203: 18.94,6.4 18.94,6.9 19.34,7.3 U1.36
  TOP w0.229: 18.94,6.4 19.39,5.96 v1(19.39,4.26)
  BOTTOM w0.203: 19.99,1.91 19.43,2.47 19.43,4.22 v1(19.39,4.26)
KP_P12_5: length 9
  TOP w0.203: J9.3 24.41,22.23 23.36,21.17 23.3,21.17 22.97,20.84 22.97,20.82 22.6,20.45 22.6,17.99 22.6,17.99 22.6,17.11 22.8,16.9 23.86,16.9 24.14,16.63 24.14,15.92 U1.4
KP_VCCD: length 20.6
  TOP w0.229: U1.57 26.7,10.87 27.18,10.38 v1(27.18,10.08) ; U1.26 17.68,12.06 17.22,11.61
  TOP w0.508: 17.22,11.61 16.59,11.61 16.24,11.25 v1(16.18,11.25) 16.18,11.15 16.11,11.07 16.11,10.76 14.99,9.64 C10.1
  BOTTOM w0.635: v1(16.18,11.25) 16.18,11.25 16.56,11.63 17.63,11.63 19.61,9.65 25.28,9.65 25.71,10.08 v1(27.18,10.08) 27.19,10.08 27.37,9.91 28.77,9.91 C28.2
KP_VDD: length 85.3
  TOP w0.229: U1.17 18.94,16.91 18.83,17.02 v1(18.75,17.02) ; v1(21.49,5.05) 21.42,5.12 21.42,6.26 21.49,6.32 ; U1.44 22.54,7.38 21.5,6.34 ; U1.67 26.66,14.86 26.86,14.67 26.94,14.67 ; U1.59 27.34,11.67 ; v1(15.86,12.25) 15.93,12.32 17.02,12.32 17.56,12.87 U1.24
  TOP w0.254: 18.16,7.37 18.16,7.43 U1.35 ; 27.08,8.51 26.72,8.86 U1.52 ; 27.34,11.67 28.12,11.67 28.18,11.61
  TOP w0.381: C11.1 27.58,8.51 27.08,8.51 ; 26.94,14.67 28.53,14.67 C3.1 ; C1.1 R1.1
  TOP w0.508: v1(28.85,6.36) 28.8,6.41 C11.1 28.8,7.49 29.54,8.23 31.24,8.23 31.62,8.61 31.67,8.61 v1(31.67,8.61) ; 18.47,3.41 18.55,3.49 18.55,5.05 17.91,5.69 C14.1 17.7,6.91 18.16,7.37 ; 14.99,11.37 14.99,11.43 14.48,11.94 12.07,11.94 11.58,11.46 11.58,10.77 11.6,10.76 11.6,10.2 11.58,10.19 11.58,9.8 11.54,9.76 ; v1(18.75,17.02) 18.75,17.11 18.53,17.32 C1.1
  TOP w0.635: 11.54,9.76 11.54,9.66 12.01,9.19 12.01,9.14 12.14,9.02 12.14,8.23 13,7.37 13,5.32 14.84,3.48 14.85,3.48 14.93,3.4 17.25,3.4 17.27,3.41 20.86,3.41 21.49,4.04 v1(21.49,5.05) 21.49,6.32 21.5,6.34 ; 28.18,11.61 28.21,11.61 28.26,11.56 C5.1 28.89,11.65 28.89,12.73 v1(28.85,12.78) ; v1(15.86,12.25) 14.99,11.37 C6.1 ; C3.1 v1(28.85,14.06)
  BOTTOM w0.381: C39.1 22.91,5.13 23.64,5.87 25.06,5.87 C38.1
  BOTTOM w0.508: C39.1 21.54,5.11 v1(21.49,5.05) ; C38.1 25.62,5.85 26.13,6.36 v1(28.85,6.36)
  BOTTOM w0.635: 28.85,12.79 v1(28.85,14.06) ; 28.85,12.79 v1(28.85,12.78) ; 28.85,12.79 29.71,12.79 30.39,12.1 C24.1 31.71,11.56 32.31,10.96 32.31,9.24 v1(31.67,8.61) ; C25.1 15.02,11.41 v1(15.86,12.25) 18.66,15.04 18.66,16.88 18.75,16.96 v1(18.75,17.02)
  BOTTOM w0.762: v1(18.75,17.02) 18.75,17.11 17.18,18.67 R8.1
KP_XRES: length 3.8
  TOP w0.152: R1.2 19.82,18.21 C2.1
  TOP w0.203: C2.1 21.06,17.48 21.74,16.79 U1.10
P0_0: length 9.7
  TOP w0.152: U2.48 75.91,7.66 76.59,6.97 76.59,5.99 76.54,5.94 76.54,4.08 77.35,3.28 79.58,3.28 J2.11
P0_1: length 11.9
  TOP w0.152: U2.49 76.31,7.69 76.9,7.1 76.9,5.87 76.85,5.82 76.85,4.21 77.37,3.68 79.6,3.68 80.16,3.12 82.27,3.12 J2.10
P0_2: length 14.6
  TOP w0.152: J2.9 84.79,3.15 84.25,3.15 83.74,3.66 80.35,3.66 79.89,4.11 77.42,4.11 77.29,4.24 77.28,4.24 77.15,4.37 77.15,5.69 C12.1 77.92,6.52 76.71,7.72 U2.50
P0_3: length 15.8
  TOP w0.152: 78.24,7.39 77.54,7.39 77.11,7.81 U2.51
  TOP w0.178: 78.24,7.39 79.13,7.39 79.53,6.99 C13.1 80.61,6.49 81.43,5.67 81.43,5.41 82.34,4.5 87.73,4.5 88.57,3.66 J2.8
P0_4: length 17.4
  TOP w0.152: 78.28,9.27 78.79,8.76 82.14,8.76 C9.1 83.52,7.38 87.41,7.38 91.11,3.68 J2.7
  TOP w0.178: 78.28,9.27 U2.53
P0_5: length 19.1
  TOP w0.178: J2.6 93.37,1.91 87.57,7.71 85.22,7.71 85.22,7.71 84.95,7.71 84.95,7.7 84.68,7.7 83.31,9.07 78.92,9.07 78.61,9.39 78.61,9.4 78.41,9.6 78.4,9.6 78.33,9.66 U2.54
P0_6: length 21.8
  TOP w0.178: J2.5 94.92,3.17 92.75,3.17 87.88,8.04 85.09,8.04 85.08,8.04 84.82,8.04 83.45,9.4 79.08,9.4 78.55,9.93 78.53,9.93 78.39,10.07 U2.55
P0_7: length 24.5
  TOP w0.178: U2.56 77.78,10.45 78.48,10.45 78.67,10.26 78.69,10.26 79.21,9.73 83.59,9.73 84.95,8.37 88.02,8.37 92.78,3.61 97.03,3.61 J2.4
P1_2: length 16.9
  TOP w0.152: U2.13 72.31,16.78 72.23,16.86 72.23,16.87 72.18,16.92 72.18,17.36 70.05,19.48 63.14,19.48 62.58,18.92 61.59,18.92 60.63,19.89 J1.19
P1_3: length 58.4
  TOP w0.178: J1.20 58.09,21.59 61.07,18.61 63.11,18.61 63.27,18.77 v1(63.27,18.81) 63.62,19.15 69.93,19.15 71.86,17.22 71.86,16.79 71.92,16.74 U2.14 ; J5.6 v1(93.84,12.06)
  BOTTOM w0.152: v1(93.84,12.06) 94.4,12.62 94.4,15.26 88.95,20.7 71.17,20.7 70.13,19.66 64.12,19.66 v1(63.27,18.81)
P1_4: length 66
  TOP w0.178: J1.21 58.37,19.41 v1(59.26,19.41) 60.41,18.25 63.72,18.25 64.27,18.81 69.81,18.81 71.51,17.1 U2.15 ; J5.8 92.94,10.79 93.32,11.17 v1(94.15,11.17)
  BOTTOM w0.152: v1(59.26,19.41) 59.87,20.02 69.85,20.02 70.84,21.01 89.13,21.01 94.73,15.41 94.73,11.71 94.19,11.17 v1(94.15,11.17)
P1_5: length 21.6
  TOP w0.178: U2.16 71.11,16.72 69.36,18.48 64.68,18.48 64.12,17.92 57.32,17.92 J1.22
P1_6: length 23
  TOP w0.178: J1.23 55.11,17.59 66.31,17.59 66.54,17.36 68.7,17.36 69.42,16.63 69.42,15.77 69.93,15.27 U2.18
P1_7: length 25.9
  TOP w0.178: U2.19 69.51,14.86 69.09,15.29 69.09,16.49 68.56,17.03 66.39,17.03 66.15,17.26 54.32,17.26 50.58,20.99 49.71,20.99 48.47,22.23 J1.24
P2_0: length 32.5
  TOP w0.178: J1.1 102.06,17.93 98.86,17.93 96.26,15.33 82.69,15.33 82.67,15.35 82.21,15.35 82.19,15.33 81.56,15.33 79.28,13.05 78.65,13.05 78.46,12.87 U2.62
P2_1: length 68.2
  TOP w0.178: J1.2 100.08,18.49 98.48,18.49 95.87,15.89 v1(86.46,15.89) 86.23,15.66 82.83,15.66 82.81,15.68 82.07,15.68 82.05,15.66 81.29,15.66 79.06,13.43 79.01,13.38 78.51,13.38 78.39,13.26 U2.63
  BOTTOM w0.152: R18.1 55.58,11.13 59.92,11.13 60.58,11.79 60.58,13.08 61.97,14.47 61.99,14.47 63.47,15.96 64,15.96 64,15.96 66.56,15.96 66.56,15.96 66.82,15.96 67.27,15.5 72.62,15.5 74.11,16.99 74.11,17.59 74.72,18.2 75.81,18.2 76.03,17.98 84.26,17.98 86.36,15.89 v1(86.46,15.89)
P2_2: length 59.9
  TOP w0.178: v1(66.32,14.75) 66.24,14.75 66.15,14.83 59.92,14.83 SW1.1A SW1.1B ; U2.64 78.33,13.67 78.37,13.71 78.79,13.71 78.81,13.72 78.9,13.81 79.14,14.05 79.16,14.07 81.33,16.23 85.21,16.23 v1(85.22,16.22) 85.45,16.45 95.49,16.45 J1.3
  BOTTOM w0.152: v1(85.22,16.22) 85.16,16.22 83.7,17.68 77.17,17.68 74.03,14.54 66.53,14.54 v1(66.32,14.75)
P2_3: length 24.3
  TOP w0.178: J1.4 93.28,16.78 81.25,16.78 78.53,14.06 U2.65
P2_4: length 21.6
  TOP w0.178: J1.5 91.07,17.11 81.11,17.11 78.48,14.48 78.45,14.48 78.42,14.47 77.88,14.47 77.87,14.47 U2.66
P2_5: length 19.3
  TOP w0.178: J1.6 88.86,17.44 79.01,17.44 77.77,16.2 77.77,15.26 U2.68
P2_6: length 17.3
  TOP w0.178: U2.1 77.11,16.47 77.13,16.49 77.13,17.17 77.88,17.91 86.79,17.91 J1.7
P2_7: length 15.3
  TOP w0.178: U2.2 76.71,16.54 76.8,16.63 76.8,17.39 77.83,18.41 84.76,18.41 J1.8
P3_0: length 28.4
  TOP w0.178: J2.25 48.76,5.27 63.36,5.27 67.43,9.34 67.43,9.38 68.14,10.09 68.56,10.09 69.19,10.71 69.22,10.71 69.37,10.87 U2.29
P3_1: length 25.7
  TOP w0.178: J2.24 50.97,4.94 63.57,4.94 67.76,9.14 67.76,9.25 68.28,9.76 68.7,9.76 69.32,10.38 69.35,10.38 69.43,10.46 U2.30
P3_2: length 40.9
  TOP w0.152: v1(68.34,9.03) 68.38,9.03 68.62,9.27 68.66,9.3 68.8,9.44 68.83,9.44 69.46,10.07 U2.31 ; J2.23 49.25,0.69 44.88,0.69 44.17,1.4 44.17,2.41 47.53,5.77 57.78,5.77 59.06,7.04 62.78,7.04 v1(64.48,8.74) 64.77,8.74 65.57,9.54 C7.1
  BOTTOM w0.152: v1(64.48,8.74) 64.48,8.16 65.08,7.56 67.86,7.56 68.35,8.04 68.35,8.98 68.34,8.99 v1(68.34,9.03)
P3_3: length 20.4
  TOP w0.178: U2.32 70.05,9.68 69.52,9.68 68.91,9.07 68.91,9.06 68.9,9.04 68.9,8.79 68.57,8.47 68.57,8.47 64.71,4.61 55.71,4.61 J2.22
P3_4: length 17.7
  TOP w0.178: U2.33 69.57,9.27 69.24,8.93 69.24,8.66 68.71,8.13 68.7,8.13 64.85,4.28 57.92,4.28 J2.21
P3_5: length 15.1
  TOP w0.178: U2.34 70.06,8.37 69.62,7.92 68.97,7.92 68.85,7.8 68.84,7.8 64.99,3.95 60.13,3.95 J2.20
P3_6: length 14.2
  TOP w0.178: J2.19 62.34,3.62 67.35,3.62 67.77,4.04 67.77,4.86 68.27,5.36 69.31,5.36 71.11,7.16 U2.36
P3_7: length 12
  TOP w0.178: U2.37 71.51,7.77 71.48,7.73 71.48,7.05 69.45,5.03 68.53,5.03 68.1,4.6 68.1,3.86 67.49,3.25 64.52,3.25 J2.18
P5LP_VDD: length 12.6
  TOP w0.381: v1(56.78,11.67) 56.06,10.95 v1(56.06,8.99)
  BOTTOM w0.508: R15.1 R11.1 v1(56.78,11.67)
  BOTTOM w0.635: v1(56.06,8.99) 55.65,9.4 R20.2 53.01,9.11 J4.2
P12_2: length 44.8
  TOP w0.178: U2.46 75.11,6.89 75.8,6.21 v1(76.05,6.21) ; v1(74.7,17.23) 75.01,17.54 75.01,20.55 J1.14
  BOTTOM w0.178: v1(74.7,17.23) 74.66,17.19 74.66,16.97 72.87,15.19 67.14,15.19 66.69,15.64 63.6,15.64 62.12,14.15 62.11,14.15 61.06,13.11 61.06,11 61.8,10.26 62.39,10.26 62.97,9.68 62.97,8.75 64.81,6.91 67.59,6.91 67.6,6.91 67.86,6.91 67.86,6.9 68.13,6.9 69.33,8.1 73.88,8.1 75.45,6.53 75.72,6.53 v1(76.05,6.21)
P12_3: length 42
  TOP w0.178: v1(75.59,17.65) 75.59,20.9 75.87,21.18 J1.13 ; U2.47 75.51,7.29 75.66,7.14 75.66,7.13 v1(75.68,7.12)
  BOTTOM w0.178: v1(75.59,17.65) 75.59,17.2 73.25,14.86 67.01,14.86 66.55,15.31 63.74,15.31 62.26,13.82 62.24,13.82 61.39,12.97 61.39,11.14 61.94,10.59 62.25,10.59 62.25,10.59 62.52,10.59 63.3,9.82 63.3,8.89 64.95,7.24 67.73,7.24 67.73,7.24 67.99,7.24 69.19,8.43 74.36,8.43 v1(75.68,7.12)
P12_4: length 7.2
  TOP w0.178: J1.12 76.47,20.29 76.47,16.77 76.31,16.61 U2.3
P12_5: length 11.9
  TOP w0.178: U2.4 75.91,16.67 76.14,16.9 76.14,20.65 77.11,21.62 77.11,22.67 77.9,23.46 79.72,23.46 J1.11
P12_6: length 62.2
  TOP w0.178: v1(49.23,20.68) 49.23,20.67 49.47,20.42 50.11,20.42 53.61,16.93 65.87,16.93 66.19,16.61 68.51,16.61 68.76,16.36 68.76,15.15 69.45,14.47 U2.20
  BOTTOM w0.152: v1(49.23,20.68) 49.23,20.67 48.79,20.23 R23.1
  BOTTOM w0.178: J1.10 82.27,23.44 81.47,23.44 81.46,23.46 57.48,23.46 56.78,22.76 56.78,21.45 56.01,20.68 v1(49.23,20.68)
P12_7: length 52.4
  TOP w0.178: v1(84.62,20.09) 84.61,20.1 84.61,20.8 J1.9 ; v1(60.5,15.84) 60.85,15.49 67.59,15.49 68.8,14.29
  TOP w0.203: U2.21 69.02,14.06 68.8,14.29
  BOTTOM w0.178: 60.33,17.75 60.33,16.01 v1(60.5,15.84) ; 60.33,17.75 60.33,17.78 ; 60.33,17.75 60.66,18.08 ; 60.66,18.08 63.88,18.08 65.13,19.33 70.56,19.33 71.32,20.09 v1(84.62,20.09) ; 60.66,18.08 60.45,18.08 ; 60.25,18.08 60.33,18.01 60.33,17.96 ; 60.25,18.08 60.45,18.08 ; 60.25,18.08 60.02,18.08 ; 60.33,17.96 60.45,18.08 ; 60.33,17.96 60.33,17.78 ; 60.33,17.78 60.02,18.08 ; 60.02,18.08 52.17,18.08 51.54,17.45 51.54,16.34 R22.1
P15_0: length 18.9
  TOP w0.178: U2.27 69.64,11.67 69.61,11.63 69.17,11.63 68.29,10.75 67.9,10.75 67.9,10.75 67.8,10.75 66.77,9.72 66.77,9.62 63.65,6.5 61.08,6.5 60.51,5.93 v1(60.51,5.87)
  BOTTOM w0.178: v1(60.51,5.87) 61.3,5.87 65.27,1.91 J2.17
P15_1: length 17.9
  TOP w0.178: U2.28 69.27,11.26 68.43,10.42 68,10.42 67.1,9.52 67.1,9.48 63.45,5.83 v1(62.14,5.83)
  BOTTOM w0.178: J2.16 67.02,3.14 65.16,3.14 62.47,5.83 v1(62.14,5.83)
P15_2: length 7.2
  TOP w0.152: J2.15 70.79,3.99 72.28,5.47 C42.1
  TOP w0.178: U2.40 72.72,7.57 72.47,7.32 C42.1
P15_3: length 7.1
  TOP w0.152: C41.1 73.27,4.88 73.27,1.96 J2.14
  TOP w0.178: U2.41 73.11,7.5 72.83,7.22 72.83,6.5 C41.1
P15_4: length 26.5
  TOP w0.152: 81.33,13.51 81.45,13.64 R5.2
  TOP w0.178: U2.60 78.88,12.06 78.97,12.16 v1(79.02,12.16) 79.97,12.16 81.33,13.51
  BOTTOM w0.178: J2.13 77.43,3.47 84.14,3.47 84.56,3.05 84.96,3.05 85.22,3.3 85.22,4.09 84.43,4.88 84.43,6.63 80.21,10.85 80.07,10.85 79.01,11.91 79.01,12.15 v1(79.02,12.16)
P15_5: length 22.2
  TOP w0.178: U2.61 78.53,12.46 78.78,12.72 79.74,12.72 v1(79.78,12.76)
  BOTTOM w0.178: J2.12 79.64,3.14 84,3.14 84.42,2.72 85.1,2.72 85.55,3.17 85.55,4.23 84.76,5.02 84.76,6.77 80.35,11.18 80.22,11.18 79.78,11.62 v1(79.78,12.76)
P_VCCD: length 21.1
  TOP w0.178: 68.86,11.96 69.47,11.96 69.53,12.02 70.02,12.02 U2.26 ; U2.57 78.55,10.87 79.13,10.29 v1(79.97,10.29)
  TOP w0.381: v1(68.22,11.47) 68.37,11.47 68.86,11.96
  BOTTOM w0.508: 68.48,10.21 67.92,9.65 C29.1 67.26,8.42 C31.1
  BOTTOM w0.635: v1(79.97,10.29) 78.97,10.29 77.73,9.04 77.69,9.04 77.69,9.04 69.65,9.04 68.22,10.47 v1(68.22,11.47)
PROG_RESET: length 115.2
  TOP w0.152: v1(92.95,10.15) 92.32,9.53
  TOP w0.178: U2.10 73.52,17.29 73.39,17.42 v1(73.39,17.45) 73.39,17.91 C17.1 71.48,20.83 v1(69.19,20.83) ; SW2.1 96.96,10.51 93.3,10.51 v1(92.95,10.15) ; 92.32,9.53 J5.10
  TOP w0.203: U1.3 24.54,16.81 23.61,17.75 v1(23.17,17.75) ; SW3.1A SW3.1B 34.51,4.69 33.53,5.66 33.53,13.47 33.73,13.68 v1(33.74,13.68) 36.41,13.68 38.13,11.96 43,11.96 43.1,12.06 44.98,12.06 v1(46.3,13.39)
  BOTTOM w0.152: R19.2 87.41,18.29 76.16,18.29 75.94,18.5 74.44,18.5 v1(73.39,17.45) ; v1(46.3,13.39) 46.86,13.94 46.86,17.34 47.47,17.95 50.12,17.95 50.89,18.72 56.88,18.72 58.53,20.37 68.73,20.37 v1(69.19,20.83)
  BOTTOM w0.178: R19.2 92.25,13.45 92.25,10.85 v1(92.95,10.15)
  BOTTOM w0.203: v1(23.17,17.75) 23.17,17.37 25.25,15.29 31.18,15.29 31.56,15.66 32.69,15.66 33.72,14.63 33.72,13.69 v1(33.74,13.68)
PROG_SWDCLK: length 99
  TOP w0.178: v1(62.35,19.47) 62.35,21.77 62.81,22.23 J1.18 65.56,19.84 70.73,19.84 v1(71.63,18.94) 71.63,18.76 71.63,18.76 71.63,18.35 72.5,17.49 72.5,17.05 72.72,16.83 U2.12 ; v1(93.84,13.27) 92.83,13.27 92.76,13.34 91.03,13.34 ; v1(48.55,15.57) 47.59,14.61 J3.4
  TOP w0.203: U1.47 23.74,8.21 23.74,6.72 23.7,6.67 v1(23.7,6.59)
  BOTTOM w0.152: v1(71.63,18.94) 71.63,19.31 71.99,19.67 73.85,19.67 73.85,19.67 76.9,19.67 77.07,19.51 89.19,19.51 93.84,14.86 v1(93.84,13.27) ; v1(62.35,19.47) 62.33,19.47 61.58,18.72 57.31,18.72 57.01,18.41 51.05,18.41 50.28,17.64 47.6,17.64 47.17,17.21 47.17,16.92 48.52,15.57 v1(48.55,15.57)
  BOTTOM w0.203: J3.4 41.83,13.34 41.83,12.85 41.12,12.14 39.9,12.14 39.24,12.8 39.24,13.39 J7.4 36.22,12.8 36.22,9.68 33.3,6.76 32.97,6.76 32.97,6.76 32.63,6.76 32.63,6.77 32.29,6.77 32.29,6.77 29.58,6.77 29.31,7.04 24.14,7.04 v1(23.7,6.59)
PROG_SWDIO: length 95.5
  TOP w0.178: v1(93.16,14.77) 92.99,14.61 J5.2 ; U2.11 73.11,16.9 72.83,17.18 72.83,18.02 v1(72.44,18.4) 72.44,18.92 71.13,20.23 67.71,20.23 J1.17
  TOP w0.203: v1(22.53,6.03) 22.53,6.6 23.34,7.41 U1.46
  BOTTOM w0.152: J3.5 45.64,17.14 47.08,18.58 49.75,18.58 50.52,19.35 56.62,19.35 58.27,21.01 64.49,21.01 J1.17
  BOTTOM w0.178: v1(93.16,14.77) 93.07,14.77 88.65,19.19 76.82,19.19 76.66,19.35 73.48,19.35 72.52,18.4 v1(72.44,18.4)
  BOTTOM w0.203: J3.5 41.88,15.93 41.88,15.21 41.15,14.48 39.93,14.48 39.19,15.21 39.19,15.98 J7.5 35.81,14.94 35.81,9.85 33.14,7.17 32.8,7.17 32.46,7.17 32.46,7.18 29.75,7.18 29.48,7.44 23.56,7.44 22.53,6.41 v1(22.53,6.03)
UART RX: length 55
  TOP w0.178: 38.36,18.89 39.78,17.48 41.46,17.48 42.37,18.39 43.96,18.39 v1(44.6,17.74) 44.64,17.71 47.22,17.71 v1(47.84,17.09) ; 32.97,20.73 32.34,20.73 32.09,20.47 28.58,20.47 28.06,19.96 25.03,19.96 24.07,19.96 23.84,19.73 v1(23.73,19.73)
  TOP w0.203: U1.20 17.28,14.47 16.59,15.16 12.88,15.16 v1(12.49,15.55) ; 32.97,20.73 35.56,20.73 37.32,18.96 v1(37.69,18.96) 38.29,18.96 38.36,18.89
  BOTTOM w0.178: v1(47.84,17.09) 49.94,17.09 50.51,16.53 R22.2
  BOTTOM w0.203: J9.6 17.44,22.21 ; 17.44,22.21 17.44,20.57 17.79,20.22 22.96,20.22 23.45,19.73 v1(23.73,19.73) ; 17.44,22.21 16.51,21.29 15.89,21.29 15.51,20.9 13.72,20.9 12.62,19.81 12.62,15.67 v1(12.49,15.55)
UART TX: length 54.6
  TOP w0.203: v1(12.46,14.64) 16.42,14.64 16.99,14.06 U1.21
  BOTTOM w0.178: 47.29,19.51 43.51,19.51 43.47,19.55 43.47,19.59 41.98,21.08 v1(41.94,21.08)
  BOTTOM w0.203: v1(41.94,21.08) 41.37,20.51 41.37,17.96 41.07,17.65 39.85,17.65 37.16,20.35 v1(37.16,20.42) 34.11,23.47 16.36,23.47 15.11,22.23 J9.7 14.09,22.23 12.19,20.32 12.19,16.2 11.82,15.83 11.82,15.27 12.21,14.87 12.22,14.87 v1(12.46,14.64)
VTARG: length 130.7
  TOP w0.381: v1(88.81,14.58) 88.79,14.61 J5.1 ; v1(89.45,7.97) 89.48,7.93 89.48,7.91 v1(93.14,4.25) ; 28.02,18.68 28.4,18.3 28.4,16.31 28.8,15.9 30.74,15.9 31.13,15.52 31.13,13.32 v1(31.07,13.26)
  TOP w0.508: J7.1 35.92,6.99 34.24,8.66 34.24,12.79 v1(34.29,12.84) ; v1(16.21,20.65) 16.08,20.78 14.19,20.78 13.51,20.1 13.51,18.64 12.78,17.91 12.78,16.64 13.28,16.13 R3.1 ; v1(32.65,19.51) 32.56,19.42 29.07,19.42 28.33,18.68 27.02,18.68 26.88,18.54 23.76,18.54 23.42,18.89 v1(23.42,18.89)
  TOP w0.635: v1(84.6,3.8) 86.2,3.8 86.95,3.05 v1(87.05,3.05)
  BOTTOM w0.508: v1(89.45,7.97) 88.12,9.3 TVS1.1 87.33,10.09 D2.1 87.33,13.69 88.21,14.58 v1(88.81,14.58) ; 65.74,3.73 67.12,3.73 67.55,3.3 68.83,3.3 69.3,2.83 69.74,2.83 70.21,3.3 73.91,3.3 74.1,3.11 75.1,3.11 75.29,3.3 75.51,3.3 76.35,4.14 77.5,4.14 ; v1(34.29,12.84) 33.1,12.84 31.99,13.95 ; v1(16.21,20.65) 16.32,20.65 17.64,19.33 21.81,19.33 R9.1 22.67,19.39 23.17,18.89 v1(23.42,18.89) ; C33.1 89.89,13.34
  BOTTOM w0.635: 89.89,13.34 89.89,14.52 R19.1 v1(88.81,14.58) ; R7.1 32.26,19.9 v1(32.65,19.51) ; v1(93.14,4.25) 92.27,3.38 87.38,3.38 v1(87.05,3.05) ; J4.1 51.4,7.91 R20.1 ; J4.1 50.47,5.97 51.1,5.33 58.06,5.33 59.54,6.81 62.28,6.81 65.38,3.71 65.71,3.71 65.74,3.73 ; J4.1 J3.1 42.98,6.86 38.15,6.86 J7.1 ; D1.1 31.99,13.89 31.36,13.26 v1(31.07,13.26) ; v1(84.6,3.8) 84.26,4.14 77.5,4.14
N11032: length 16.2
  TOP w0.635: v1(11.08,8.86) 10.78,8.56 J10.1
  BOTTOM w0.508: v1(11.08,8.86) 12.18,8.86 12.8,8.24 15.74,8.24 16.17,7.81 16.17,7.56 16.8,6.92 F2.2 16.8,4.34 16.32,3.86 C40.1
N11130: length 3.6
  TOP w0.508: LED2.2 29.91,17.52 v1(29.16,16.77)
  BOTTOM w0.203: v1(29.16,16.77) 28.37,17.56 R10.1
N039981: length 10.6
  TOP w0.203: v1(27.27,16.02) 26.89,16.02 25.89,17.02 v1(25.89,17.09)
  BOTTOM w0.203: v1(25.89,17.09) 25.89,17.58 25.36,18.12 U3.1 ; v1(27.27,16.02) 27.02,15.77 25.27,15.77 23.95,17.09 23.95,17.78 23.41,18.32 23.27,18.32 23.25,18.34 22.31,18.34 R9.2
N046484: length 1.8
  BOTTOM w0.203: R7.2 27.62,19.9 27.21,19.49 U3.4
N5090994: length 3
  TOP w0.508: LED1.2 v1(53.24,14.02)
  BOTTOM w0.508: v1(53.24,14.02) 52.55,13.34 R18.2
N5091026: length 8.1
  TOP w0.381: v1(102.21,8.23) 102.21,8.24 102.21,9.98 102.99,10.76 J6.1
  BOTTOM w0.508: F1.2 102.03,7.39 C27.1 102.21,8.23 v1(102.21,8.23)
N12931548: length 12.1
  TOP w0.508: v1(96.96,5.95) 94.39,8.53 v1(94.39,9.06)
  BOTTOM w0.178: 91.57,10.77 91.74,10.59 91.74,9.73
  BOTTOM w0.508: D2.2 91.57,10.77 91.57,9.9 92.41,9.06 v1(94.39,9.06) ; v1(96.96,5.95) 97.3,5.61 F1.1
N12939185: length 2
  TOP w0.152: R5.1 83.68,13.28 C4.1
N16779589: length 5.8
  TOP w0.203: v1(12.43,10.03) 12.9,9.56 12.9,8.44 14.15,7.19 LED3.2
  BOTTOM w0.203: v1(12.43,10.03) 12.52,10.03 13.28,9.27 R21.2

## Copper pours and planes (outline as drawn; the poured copper is in the pictures)
GND_EARTH1 on TOP (solid shape): 104.82,13.96 103.36,13.96 103.36,15.96 104.82,15.96
GND_EARTH1 on TOP (solid shape): 104.82,8.17 103.36,8.17 103.36,10.17 104.82,10.17
GND_EARTH1 on TOP (solid shape): 105.77,15.45 108.02,15.45 108.02,14.14 105.07,14.14 105.07,15.96 105.77,15.96
GND_EARTH1 on TOP (solid shape): 108.02,8.68 105.77,8.68 105.77,8.17 105.07,8.17 105.07,9.99 108.02,9.99
GND_SIGNAL on TOP: 41.58,23.5 41.58,0.64 108.25,0.64 108.25,23.5 ; 68 cut-outs
GND_SIGNAL on TOP: 11.73,23.5 39.67,23.5 39.67,0.64 11.73,0.64 11.73,6.32 0.97,6.32 0.97,17.78 11.73,17.78 ; 17 cut-outs
GND_SIGNAL on BOTTOM: 11.73,23.5 39.67,23.5 39.67,0.64 11.73,0.64 11.73,6.35 0.94,6.35 0.94,17.78 11.73,17.78 ; 14 cut-outs
GND_SIGNAL on BOTTOM: 41.58,23.5 41.58,0.64 108.25,0.64 108.25,23.5 ; 60 cut-outs
Net_5 on TOP (solid shape): 108.62,12.31 106.12,12.31 106.12,13.74 108.62,13.74
Net_6 on TOP (solid shape): 108.62,10.39 106.12,10.39 106.12,11.82 108.62,11.82

## Text on the board
BOTTOM: L | 2 | 600-60243-01 REV05 SECONDARY SIDE
Ref Des/Assembly Bottom: SECONDARY SIDE | ASSEMBLY DRAWING | CY8CKIT-059 PSoC 5LP | PROTOTYPING KIT | 620-60243-01
Board Geometry/Soldermask Bottom: 600-60243-01 REV05 SECONDARY SOLDERMASK
Ref Des/Silkscreen Bottom: 600-60243-01 REV05 | 7 | 1 | . | 0 | 12 | 6 | 12.7 | 12.6 | 12.0 | 12.1 | 3 | 5 | 4 | U3 | UART RX | UART TX | I2C SCL | I2C SDA | GND | VBUS | PINS | KITPROG | VTARG | RST | SWDIO | SWDCLK | IO | VDD | 2 | J4 | 15 | C | Y | WWW.CYPRESS.COM/CY8CKIT-059 | SW1 | LED1 | R | 2.1 | 2.2 | SCL | SDA | CMOD | RX | TX | 600-60243-01 REV05 SECONDARY SILKSCREEN
User.Comments: 03/17/15 | SEMICONDUCTOR | PRAO | SHIB | 01/24/15 | 03/11/15 | 01/28/15 | 01/31/15 | 198 CHAMPION COURT | SAN JOSE, CA 95134 | (408) 943-2600 | 1 | 4 | 2 | 3 | 5 | ALPHA RELEASE | PRODUCTION RELEASE | BETA RELEASE | CYPRESS | C | 05
